# Altium PCB Cpt_Temp_janv2018.PcbDoc
Units mil, origin at the board's own origin, x right, y up, seen from the top; angles counter-clockwise.
Board outline 6000 x 4000 mil, 2 copper layers (Top Layer, Bottom Layer); 10 components, 8 nets, 30 pads, 10 vias.
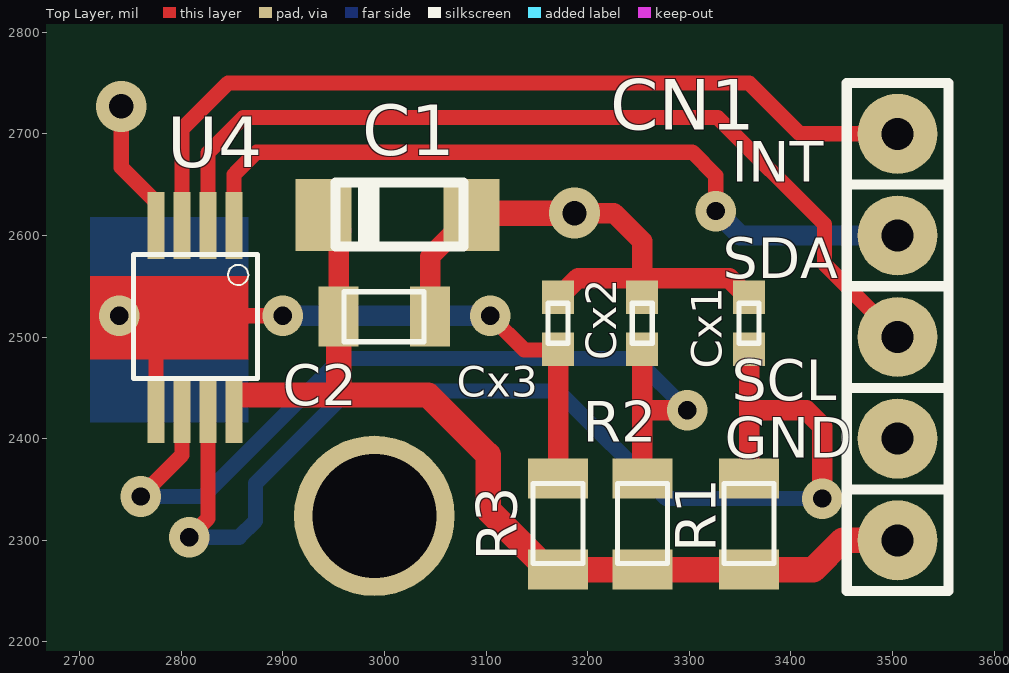
[diagram p0: Top Layer view]
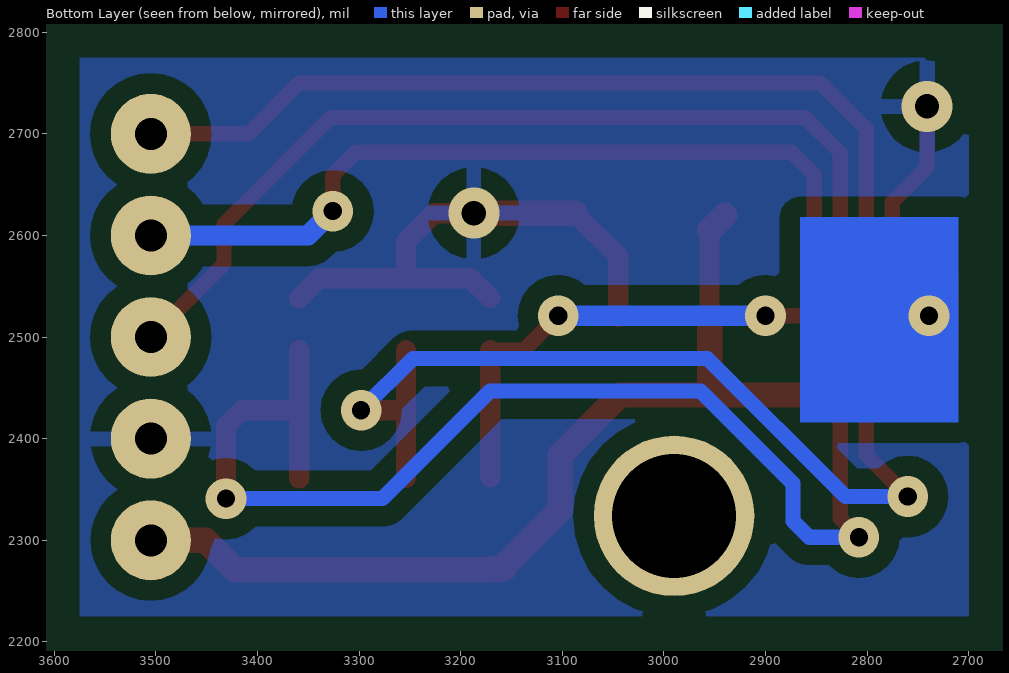
[diagram p1: Bottom Layer view, seen from below]

## Layer stack, top to bottom
Top Layer: signal copper 1.4
Dielectric: dielectric 12.6, FR-4, Dk 4.8
Bottom Layer: signal copper 1.4

## Board outline
1000,1000 7000,1000 7000,5000 1000,5000

## Design rules (kind name [scope] priority, off if disabled: settings)
Clearance [All] p1: gap=4
PolygonConnect [All] p1: connectstyle=Relief reliefconductorwidth=15 reliefentries=4 polygonreliefangle="90 Angle"
RoomDefinition Cpt_Temp [InComponentClass('Cpt_Temp')] p1: confinementstyle=ConfineIn formatcopy=TRUE lockcomponents=FALSE outline 2681,2200 3601,2200 3601,2791 2681,2791
RoutingVias [All] p1: holewidth=28 width=50 viastyle="Through Hole" minholewidth=10 minwidth=30 maxholewidth=120 maxwidth=60
SilkscreenOverComponentPads [All] p1: minsilkscreentomaskgap=10
SolderMaskExpansion [All] p1: expansion=4
Width [All] p1: maxlimit=80 minlimit=10 preferedwidth=10
27 further rules are at their usual default settings.

## Components (designator, comment, footprint, x,y, rotation, side; value= is the part's Value field where it differs from the comment)
C1 "1µF/16V" 3216-18 2940,2620 r0 top
C2 "47n" 0805 2955,2520 r0 top
CN1 "inch_ligne 1x5" INCH_1x5_droit 3505,2300 r90 top
Cx1 "PONT" 0402 3359,2488 r90 top
Cx2 "PONT" 0402 3253.73,2488 r90 top
Cx3 "PONT" 0402 3171,2488 r90 top
R1 "10K" 0805 3359,2361 r270 top
R2 "10K" 0805 3254,2361 r270 top
R3 "10K" 0805 3171,2361 r270 top
U4 "MCP9808" MSOP-08 2852,2610 r270 top

## Footprints (in the part's own frame and the unit in brackets; to place one, negate y for a bottom-side part, rotate by r counter-clockwise, add the part's x,y. Pads: shape width x height; smd on the part's side, far side on the other; paste and mask are expansions set on the pad)
0402 [mm]
  rect 0.838x0.8 smd: 1(0,0) 2(1.3,0)
  silkscreen extent 0.15,-0.25 1.15,0.25
0805 [mm] "résistance CMS"
  rect 1x1.5 smd: 1(0,0) 2(2.286,0)
  silkscreen extent 0.13,-0.63 2.13,0.63
3216-18 [mm] "condensateur tantale CMS (3,2 x 1,6 x 1,6)"
  rect 1.4x1.8 smd: 1(0,0) 2(3.7,0)
  silkscreen extent 0.3,-0.79 3.5,0.81
INCH_1x5_droit [mm] "simple rangée 2,54 mm"
  round 2 hole 0.8: 1(0,0) 2(2.54,0) 3(5.08,0) 4(7.62,0) 5(10.16,0)
  silkscreen extent -1.27,-1.27 11.43,1.27
MSOP-08 [mil] "boîtier DGK"
  rect 66x17 smd: 1(0,0) 2(0,-25.59) 3(0,-51.18) 4(0,-76.77) 5(181.1,-76.77) 6(181.1,-51.18) 7(181.1,-25.59) 8(181.1,0)
  silkscreen extent 29,-99 151,23

## Part data
C1: library part "tantale 1µF/16V", "145-7406 case 3216-18"
C2: library part Cap_CMS_0805, "CMS 0805"
CN1: library part Inch_1x5_droit, "Inch_1x5_droit"
Cx1 Cx2 Cx3: library part Pont, "Pont pour configuration I2C"
R1 R2 R3: library part "Res CMS 0805", "CMS 0805"
U4: "Digital temperature Sensor"

## Free pads (board coordinates)
  round 158 hole 122: 3(2990,2324)

## Via types
v1: diameter 40, hole 18, Top Layer to Bottom Layer, 8 vias
v2: diameter 50, hole 24, Top Layer to Bottom Layer, 2 vias

## Nets (pads, with @x,y where several pads share a name; then routed paths per layer and width w, separated by ;. In a path a pad name is that pad's centre, name@x,y a point inside that pad or via, vN(x,y) a via of type N, cw(c..) or ccw(c..) an arc to the next point about the centre after c; other vN are vias at no path point)
3V3: C1.1 C2.1 CN1.1 R1.2 R2.2 R3.2 U4.8 | length 945.1
  Top Layer w20: C2.1 C1.1@2955,2605
  Top Layer w25: U4.8@2860,2443 3043,2443 3102,2384 3102,2330 R3.2@3161,2271 ; C1.1 C1.1@2955,2605 ; 2955,2445 C2.1 ; R3.2@3157,2272 R3.2@3171,2272 ; R3.2 R2.2 R1.2 3422,2271 3451,2300 CN1.1
A0: Cx1.1 R1.1 U4.7 | length 1157.4
  Top Layer w15: v1(2808,2303) 2826.41,2321.41 U4.7
  Top Layer w20: R1.1 3359,2428 ; Cx1.1@3359,2487.06 3359,2428 ; v1(3431,2341) 3431,2412 3415,2428 3359,2428
  Bottom Layer w15: v1(2808,2303) 2857,2303 2873,2319 2873,2356 2964,2447 3171,2447 3277,2341 v1(3431,2341)
A1: Cx2.1 R2.1 U4.6 | length 887.3
  Top Layer w15: v1(2760,2343) 2800.82,2383.82 U4.6
  Top Layer w20: R2.1@3253.73,2361.27 Cx2.1@3253.73,2487.06 ; 3254.73,2428 v1(3298,2428)
  Bottom Layer w15: v1(2760,2343) 2821.28,2343 2957.28,2479 3247,2479 v1(3298,2428)
A2: Cx3.1 R3.1 U4.5 | length 616.2
  Top Layer w15: U4.5 2775.23,2502.23 2794,2521 v1(2900,2521) ; v1(3104,2521) 3137.67,2487.33 Cx3.1@3171,2487.33
  Top Layer w20: R3.1@3171,2362 Cx3.1@3171,2487.33
  Bottom Layer w20: v1(2900,2521) v1(3104,2521)
  other v1: 2739,2521
GND: C1.2 C2.2 CN1.2 Cx1.2 Cx2.2 Cx3.2 U4.4 | length 666.1
  Top Layer w15: v2(2741,2727) 2741,2667 2775.23,2632.77 U4.4
  Top Layer w20: C2.2 3045,2579.33 C1.2 ; Cx3.2@3171,2538.51 3190.42,2557.93 3253.73,2557.93 ; v2(3187,2622) 3226,2622 3253.73,2594.27 3253.73,2557.93 ; Cx1.2@3359,2538.24 3339.32,2557.93 3253.73,2557.93
  Top Layer w25: C1.2@3087.67,2622 v2(3187,2622)
INT: CN1.5 U4.3 | length 838.4
  Top Layer w15: U4.3 2800.82,2704.82 2846,2750 3359,2750 3409,2700 CN1.5
SCL: CN1.3 U4.2 | length 876.6
  Top Layer w15: U4.2 2826.41,2681.41 2861,2716 3328,2716 3433,2611 3433,2572 CN1.3
SDA: CN1.4 U4.1 | length 764.4
  Top Layer w15: U4.1 2852,2660 ; 2853.56,2661.38 2874.19,2682 3303,2682 3326,2659 v1(3326,2624)
  Bottom Layer w20: v1(3326,2624) 3350,2600 CN1.4

## Polygon pours and split planes (outlines as drawn)
GND on Bottom Layer "Bottom Layer-No Net" (solid, pour order 1000): 2700,2775 3575,2775 3575,2225 2700,2225 2700,2775

## Other copper
Top Layer:
  rectangle net A2: 2710,2478 2866,2560
Bottom Layer:
  rectangle net A2: 2710,2416 2866,2618

## Silkscreen, mask and mechanical layers (free items; w line width, h text height)
Top Overlay:
  text "INT" at 3342,2653 h40
  text "SDA" at 3333,2557.93 h40
  text "SCL" at 3342,2438 h40
  text "GND" at 3335,2381 h40
Mechanical 1:
  lines w10: 2700,2225 2700,2775 3575,2775 3575,2225 2700,2225